# Altium PCB SAMV71_Xplained_Ultra.PcbDoc (part 5 of 7)
Units mm, origin at the board's own origin, x right, y up, seen from the top; angles counter-clockwise.
Board outline 90 x 135 mm, 8 copper layers (Top Layer LF-Signals, Ground Plane 1 (GND), Power Plane (VCC), Ground Plane 2 (GND), Signal Layer 1, Signal Layer 2, Ground Plane 3 (GND), Bottom Layer LF-Signals), stack 1.588 mm thick; 391 components, 330 nets, 1782 pads, 966 vias.
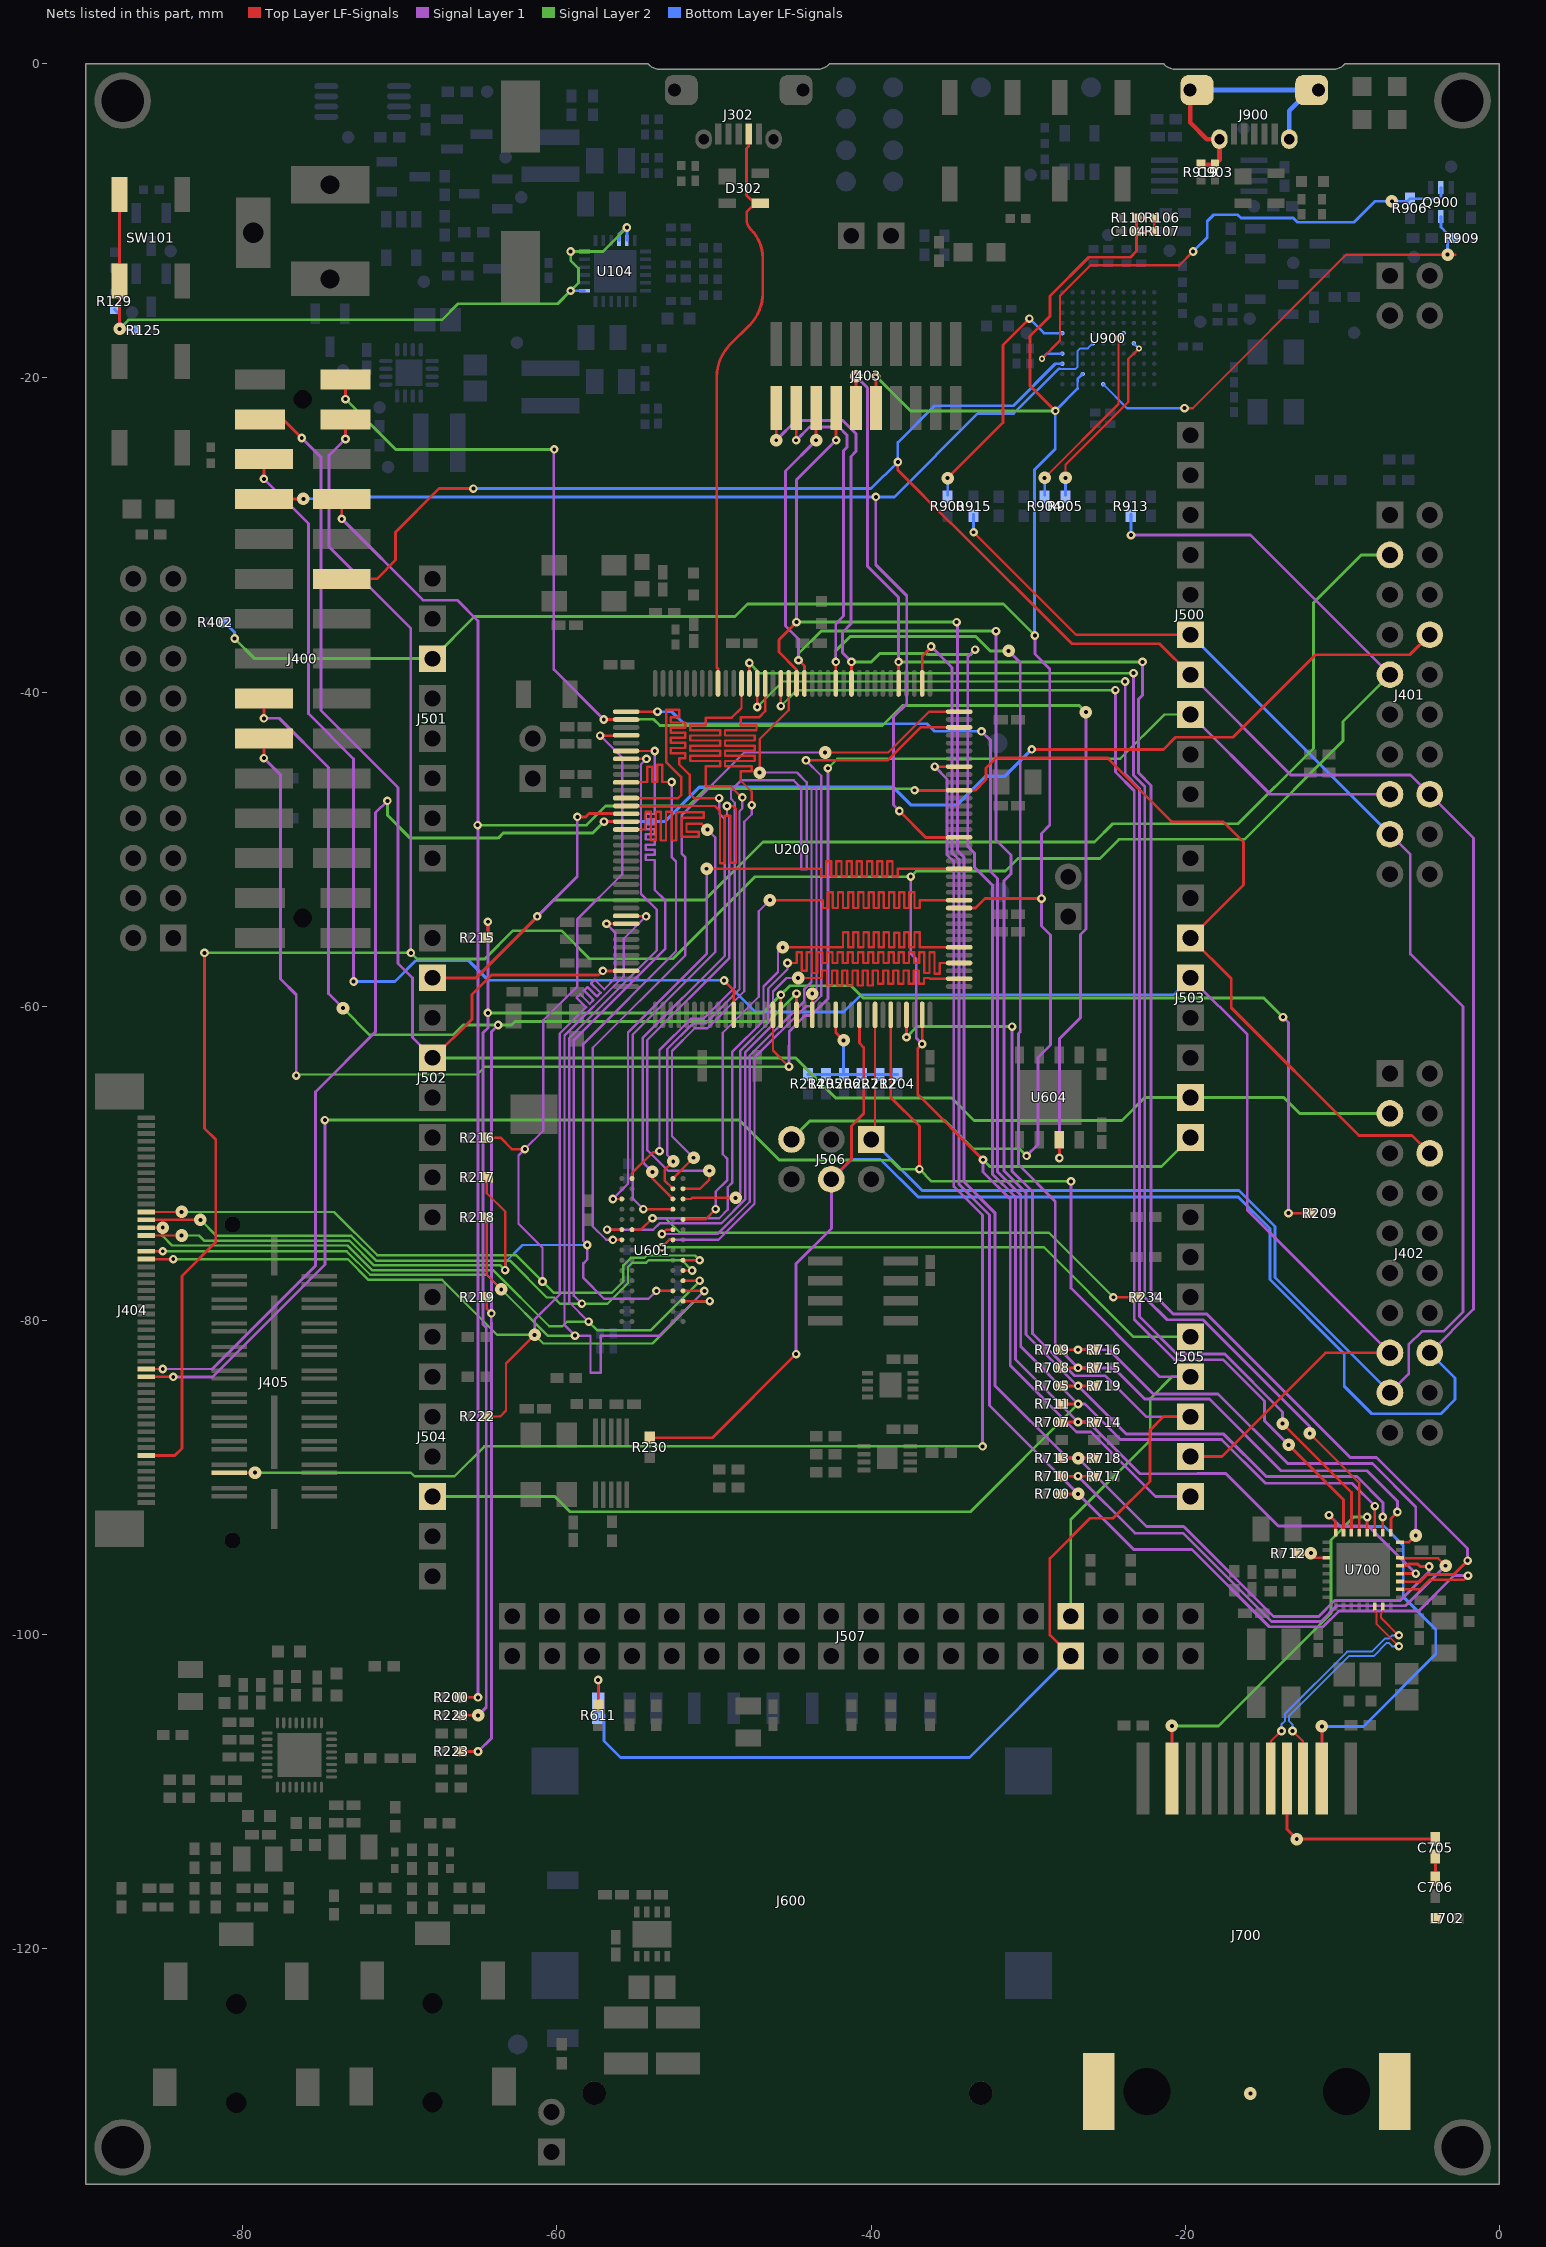
[diagram p11: the nets of this part, all layers, seen from the top]

## Via types
v1: diameter 0.55, hole 0.25, Top Layer LF-Signals to Bottom Layer LF-Signals, 547 vias
v2: diameter 0.55, hole 0.25, Top Layer LF-Signals to Bottom Layer LF-Signals, tented both sides, 190 vias
v3: diameter 0.55/0.55/0.55/0.8 (per signal layer), hole 0.25, Top Layer LF-Signals to Bottom Layer LF-Signals, tented top, 172 vias
v4: diameter 0.55, hole 0.25, Top Layer LF-Signals to Bottom Layer LF-Signals, tented top, 21 vias
v5: diameter 0.4, hole 0.2, Top Layer LF-Signals to Bottom Layer LF-Signals, tented both sides, 16 vias
v6: diameter 0.7, hole 0.35, Top Layer LF-Signals to Bottom Layer LF-Signals, 9 vias
v7: diameter 0.4, hole 0.2, Top Layer LF-Signals to Bottom Layer LF-Signals, tented top, 5 vias
v8: diameter 0.66, hole 0.33, Top Layer LF-Signals to Bottom Layer LF-Signals, tented top, 4 vias
v9: diameter 0.4, hole 0.2, Top Layer LF-Signals to Bottom Layer LF-Signals, 2 vias

## Nets (pads, with @x,y where several pads share a name; then routed paths per layer and width w, separated by ;. In a path a pad name is that pad's centre, name@x,y a point inside that pad or via, vN(x,y) a via of type N, cw(c..) or ccw(c..) an arc to the next point about the centre after c; other vN are vias at no path point) (continued)
PC23: U200.127 U601.R6 | length 53.9
  Top Layer LF-Signals w0.15: U601.R6@-55.222,-70.975 -55.222,-70.629 -53.887,-69.294 -53.541,-69.294 v1(-53.475,-69.228) ; v3(-47.1,-45.125) -47.1,-43 -45.25,-41.15 U200.127@-45.25,-39.45
  Signal Layer 1 w0.15: v1(-53.475,-69.228) -53.472,-69.225 -53.472,-62.798 -51.474,-60.8 -50.675,-60.8 -48.677,-58.802 -48.677,-47.045 -48.925,-46.798 -48.925,-46.275 -48.275,-45.625 -44.925,-45.625 -44.45,-46.1 -44.45,-51.3 -44.1,-51.3 -44.1,-45.75 -44.725,-45.125 v3(-47.1,-45.125)
PC24: U200.130 U601.R2 | length 53.6
  Top Layer LF-Signals w0.15: U601.R2@-52.622,-70.975 v3@-51.3,-69.653 ; v1(-47.6,-47.2) -47.6,-46.35 -48.3,-45.65 -48.3,-45.038 -47.592,-45.038 -47.592,-44.713 -49.3,-44.713 -49.3,-44.388 -47.4,-44.388 -47.4,-44.063 -49.3,-44.063 -49.3,-43.738 -47.4,-43.738 -47.4,-43.413 -49.3,-43.413 -49.3,-43.088 -47.4,-43.088 -47.4,-42.763 -49.3,-42.763 -49.3,-42.437 -47.3,-42.437 -47.3,-42.112 -48.3,-42.112 -48.3,-41.612 -47.137,-41.612 -46.75,-41.225 U200.130@-46.75,-39.45
  Signal Layer 1 w0.15: v3(-51.3,-69.65) -52.675,-68.275 -52.675,-62.85 -51.225,-61.4 -50.426,-61.4 -48.077,-59.051 -48.077,-48.254 -47.6,-47.776 v1(-47.6,-47.2)
PC25: U200.133 U601.P2 | length 54.4
  Top Layer LF-Signals w0.15: U601.P2@-52.622,-71.625 -53.15,-71.097 -53.15,-70.425 v3(-52.6,-69.875) ; U200.133@-48.25,-39.45 -48.25,-41.007 -48.868,-41.625 -50.525,-41.625 -50.525,-42.112 -51.525,-42.112 -51.525,-42.437 -49.6,-42.437 -49.6,-42.763 -51.525,-42.763 -51.525,-43.088 -49.6,-43.088 -49.6,-43.413 -51.525,-43.413 -51.525,-43.738 -49.6,-43.738 -49.6,-44.063 -51.525,-44.063 -51.525,-44.388 -49.6,-44.388 -49.6,-44.713 -50.525,-44.713 -50.525,-46 -48.95,-46 -48.248,-46.702 v1(-48.202,-46.702)
  Signal Layer 1 w0.15: v3(-52.6,-69.875) -52.6,-69.85 -52.975,-69.475 -52.975,-62.726 -51.349,-61.1 -50.551,-61.1 -48.377,-58.927 -48.377,-47.588 -48.202,-47.413 v1(-48.202,-46.702)
PC26: U200.13 U601.P1 | length 51.7
  Top Layer LF-Signals w0.15: U200.13@-55.6,-47.25 -50.8,-47.25 -50.798,-47.252 -49.945,-47.252 -49.652,-47.545 -49.652,-47.548 -49.625,-47.575 -49.625,-50.9 -49.325,-50.9 -49.325,-47.875 -48.975,-47.875 -48.975,-50.875 -48.6,-50.875 -48.6,-47.45 -48.8,-47.25 -49.177,-47.25 -49.18,-47.25 v1(-49.177,-47.252) ; U601.P1@-51.972,-71.625 -50.897,-71.625 -50.3,-71.028 v3(-50.3,-70.475)
  Signal Layer 1 w0.15: v3(-50.3,-70.475) -52.935,-70.475 -54.25,-69.16 -54.25,-62.15 -49.025,-56.925 -49.025,-47.975 -49.177,-47.823 v1(-49.177,-47.252)
PC27: U200.12 U601.N2 | length 53.9
  Top Layer LF-Signals w0.15: U200.12@-55.6,-46.75 -55.6,-46.752 -52.277,-46.752 -52.1,-46.575 -52.1,-45.4 -53.05,-44.45 -53.05,-41.125 -52.225,-41.125 -52.225,-41.612 -52.75,-41.612 -52.75,-41.938 -51.825,-41.938 -51.825,-42.263 -52.75,-42.263 -52.75,-42.588 -51.825,-42.588 -51.825,-42.913 -52.75,-42.913 -52.75,-43.238 -51.825,-43.238 -51.825,-43.563 -52.75,-43.563 -52.75,-43.888 -51.825,-43.888 -51.825,-44.213 -52.225,-44.213 -52.225,-44.6 -51.55,-45.275 -51.55,-46.475 -51.273,-46.752 -49.677,-46.752 v1(-49.675,-46.75) ; v3(-53.925,-70.55) -53.925,-70.972 U601.N2@-52.622,-72.275
  Signal Layer 1 w0.15: v3(-53.925,-70.55) -54.55,-69.925 -54.55,-62.024 -49.325,-56.799 -49.325,-48.099 -49.652,-47.772 -49.652,-47.545 -49.677,-47.52 -49.677,-46.752 v1(-49.675,-46.75)
PC28: U200.76 U601.N1 | length 54.6
  Top Layer LF-Signals w0.15: U601.N1@-51.972,-72.275 -51.471,-72.275 -51.4,-72.204 v3(-48.627,-72.204) ; v1(-45.325,-57.25) -44.738,-57.25 -44.738,-56.569 -44.413,-56.569 -44.413,-57.745 -44.088,-57.745 -44.088,-56.569 -43.763,-56.569 -43.763,-57.884 -43.438,-57.884 -43.438,-56.569 -43.113,-56.569 -43.113,-57.25 -42.788,-57.25 -42.788,-56.569 -42.463,-56.569 -42.463,-57.25 -42.138,-57.25 -42.138,-56.569 -41.813,-56.569 -41.813,-57.25 -41.488,-57.25 -41.488,-56.569 -41.163,-56.569 -41.163,-57.25 -40.838,-57.25 -40.838,-56.569 -40.513,-56.569 -40.513,-57.25 -40.188,-57.25 -40.188,-56.569 -39.863,-56.569 -39.863,-57.25 -39.538,-57.25 -39.538,-56.569 -39.213,-56.569 -39.213,-57.25 -38.888,-57.25 -38.888,-56.569 -38.563,-56.569 -38.563,-57.25 -38.238,-57.25 -38.238,-56.569 -37.913,-56.569 -37.913,-57.25 -37.588,-57.25 -37.588,-56.569 -37.263,-56.569 -37.263,-57.25 -36.938,-57.25 -36.938,-56.569 -36.612,-56.569 -36.612,-57.884 -36.287,-57.884 -36.287,-56.569 -35.962,-56.569 -35.962,-57.931 -35.637,-57.931 -35.637,-57.25 U200.76@-34.4,-57.25
  Signal Layer 1 w0.15: v3(-48.627,-72.204) -48.325,-71.901 -48.325,-62.824 -46.55,-61.049 -46.55,-58.874 -45.325,-57.649 v1(-45.325,-57.25)
PC29: U200.16 U601.M2 | length 52.9
  Top Layer LF-Signals w0.15: U200.16@-55.6,-48.75 -54.362,-48.75 -54.362,-47.611 -54.037,-47.611 -54.037,-49.45 -53.712,-49.45 -53.712,-47.611 -53.387,-47.611 -53.387,-49.45 -53.062,-49.45 -53.062,-47.611 -52.703,-47.611 -52.703,-49.45 -52.4,-49.45 -52.4,-47.645 -50.652,-47.645 -50.652,-48.007 -52.053,-48.007 -52.053,-49.22 -50.978,-49.22 -50.978,-48.888 -51.758,-48.888 -51.758,-48.391 -50.789,-48.391 v3(-50.427,-48.752) ; v1(-54.5,-72.925) U601.M2@-52.622,-72.925
  Signal Layer 1 w0.15: v1(-54.5,-72.925) -55.175,-72.25 -55.175,-61.801 -49.925,-56.551 -49.925,-49.255 v3(-50.427,-48.752)
PC30: J401.8@-4.43,-36.35 J404.33 U200.15 | length 120.6
  Top Layer LF-Signals w0.15: J404.33@-86.15,-83.1 v1(-85.1,-83.1)
  Top Layer LF-Signals w0.18: v1(-29.775,-43.65) -21.389,-43.65 -20.619,-42.88 -16.955,-42.88 -11.7,-37.625 -5.705,-37.625 J401.8@-4.43,-36.35
  Top Layer LF-Signals w0.2: v1(-57.005,-48.25) U200.15@-55.6,-48.25
  Signal Layer 1 w0.15: v1(-85.1,-83.1) -81.95,-83.1
  Signal Layer 1 w0.175: -81.95,-83.1 -75.375,-76.525 -75.375,-65.45 -71.55,-61.625 -71.55,-47.675 v1(-70.8,-46.925)
  Signal Layer 2 w0.2: v1(-70.8,-46.925) -70.8,-47.831 -69.335,-49.296 -63.75,-49.296 -63.437,-48.983 -57.738,-48.983 v1(-57.005,-48.25)
  Bottom Layer LF-Signals w0.2: v1(-57.005,-48.25) -53.146,-48.25 -50.955,-46.058 -38.585,-46.058 -37.443,-47.2 -34.554,-47.2 -32.711,-45.357 -31.482,-45.357 v1(-29.775,-43.65)
PC31: J401.3@-6.97,-31.27 J502.2@-67.93,-58.194 U200.14 | length 88.1
  Top Layer LF-Signals w0.18: v1(-58.7,-47.95) -58.17,-47.95 -57.955,-47.735 -55.6,-47.735 U200.14@-55.6,-47.75
  Top Layer LF-Signals w0.2: J502.2@-67.93,-58.194 -65.147,-58.194 v1@-61.256,-54.303
  Signal Layer 1 w0.18: v1(-61.256,-54.278) -58.705,-51.728 v1@-58.705,-47.95
  Signal Layer 2 w0.18: v1(-61.256,-54.278) -60.212,-53.235 -50.589,-53.235 -46.894,-49.54 -25.773,-49.54 -24.621,-48.388 -16.634,-48.388 -11.836,-43.59 -11.836,-34.311 -8.795,-31.27 J401.3@-6.97,-31.27
PD00: J504.6@-67.93,-91.214 R711.1 U200.1 U700.19 | length 137.2
  Top Layer LF-Signals w0.15: U700.19@-7.925,-93.525 v1(-7.925,-91.825)
  Top Layer LF-Signals w0.18: U200.1@-55.6,-41.25 v1(-53.6,-41.25) ; R711.1@-27.863,-85.323 v1(-26.819,-85.323)
  Signal Layer 1 w0.18: v1(-32.975,-42.5) -32.41,-43.065 -32.41,-51.414 -31.95,-51.874 -31.95,-70.537 -30.478,-72.009 -30.478,-81.664 v1(-26.819,-85.323) -26.377,-85.323 -24.116,-87.584 -17.683,-87.584 -14.892,-90.375 -9.375,-90.375 v1(-7.925,-91.825)
  Signal Layer 2 w0.18: J504.6@-67.93,-91.214 -60.139,-91.214 -59.168,-92.185 -33.681,-92.185 v1(-26.819,-85.323)
  Bottom Layer LF-Signals w0.18: v1(-53.6,-41.25) -52.69,-41.25 -51.925,-42.015 -36.432,-42.015 -35.947,-42.5 v1(-32.975,-42.5)
PD01: U200.132 U700.21 | length 88
  Top Layer LF-Signals w0.15: U200.132@-47.75,-39.45 v1(-47.75,-38.15) ; v3(-12.075,-87.2) -8.925,-90.35 U700.21@-8.925,-93.525
  Signal Layer 1 w0.18: v1(-23.3,-38.8) -23.3,-45.295 -22.575,-46.02 -22.575,-78.539 -21.15,-79.964 -18.861,-79.964 -12.075,-86.75 v3(-12.075,-87.2)
  Signal Layer 2 w0.18: v1(-47.75,-38.15) -47.1,-38.8 v1(-23.3,-38.8)
PD02: U200.131 U700.22 | length 87.6
  Top Layer LF-Signals w0.15: v1(-47.25,-40.95) U200.131@-47.25,-39.45
  Top Layer LF-Signals w0.18: v3(-13.8,-86.575) -9.425,-90.95 -9.425,-92.525 U700.22@-9.425,-93.525
  Signal Layer 1 w0.18: v1(-23.825,-39.325) -23.825,-45.237 -22.92,-46.142 -22.92,-79.764 -20.54,-82.144 -17.485,-82.144 -13.8,-85.829 v3(-13.8,-86.575)
  Signal Layer 2 w0.15: v1(-47.25,-40.95) -45.625,-39.325 v1(-23.825,-39.325)
PD03: U200.128 U700.23 | length 84.7
  Top Layer LF-Signals w0.15: v1(-45.75,-40.9) U200.128@-45.75,-39.45
  Top Layer LF-Signals w0.18: v3(-13.425,-87.925) -9.925,-91.425 U700.23@-9.925,-93.525
  Signal Layer 1 w0.18: v1(-24.45,-39.875) -24.45,-45.079 -23.25,-46.279 -23.25,-79.936 -20.682,-82.504 -17.592,-82.504 -14.96,-85.136 -14.96,-86.39 v3(-13.425,-87.925)
  Signal Layer 2 w0.15: v1(-45.75,-40.9) -44.725,-39.875 v1(-24.45,-39.875)
PD04: J403.14 R713.1 R718.2 U200.126 U700.13 | length 118.6
  Top Layer LF-Signals w0.185: U200.126@-44.75,-39.45 -44.75,-38.582 -45.875,-37.457 -45.875,-36.675 v1(-44.75,-35.55) ; v1(-42.23,-23.969) J403.14@-42.23,-21.91 ; R713.1@-27.869,-88.773 v3(-26.825,-88.773) R718.2@-25.794,-88.773 ; U700.13@-6.325,-95.625 -5.9,-95.625 -5.8,-95.525 -5.193,-95.525 -5.043,-95.675 v1(-4.475,-95.675)
  Signal Layer 1 w0.185: v1(-44.75,-35.55) -44.75,-26.489 v1(-42.23,-23.969) ; v1(-34.552,-35.552) -34.51,-35.593 -34.51,-50.09 -34.075,-50.525 -34.075,-71.2 -32.125,-73.15 -32.125,-84.146 -27.498,-88.773 v3(-26.825,-88.773) -22.473,-93.125 -20.1,-93.125 -14.377,-98.847 -11.501,-98.847 -10.491,-97.838 -6.309,-97.838 -5.114,-96.642 -5.111,-96.642 -4.475,-96.007 v1(-4.475,-95.675)
  Signal Layer 2 w0.185: v1(-44.75,-35.55) v1(-34.552,-35.552) v1(-34.552,-35.552)
PD05: J403.16 R705.1 R719.1 U200.125 U700.18 | length 109.5
  Top Layer LF-Signals w0.185: v1(-44.625,-37.975) -44.25,-38.35 U200.125@-44.25,-39.45 ; v3(-43.5,-23.969) J403.16@-43.5,-21.91 ; R705.1@-27.863,-84.173 v1(-26.819,-84.173) R719.1@-25.788,-84.173 ; U700.18@-7.425,-93.525 v1(-7.425,-92.525)
  Signal Layer 1 w0.185: v1(-44.625,-37.975) -44.625,-36.624 -45.461,-35.788 -45.461,-25.93 v3(-43.5,-23.969) ; v1(-32.05,-36.125) -32.05,-49.425 -31.1,-50.375 -31.1,-51.573 -31.542,-52.016 -31.542,-70.474 -30.145,-71.872 -30.145,-80.894 -26.866,-84.173 v1(-26.819,-84.173) -23.765,-87.226 -19.217,-87.226 ; -19.217,-87.226 -17.574,-87.226 -17.549,-87.251 -17.545,-87.251 -14.846,-89.95 -9.068,-89.95 -7.408,-91.611 -7.408,-92.508 v1(-7.425,-92.525)
  Signal Layer 2 w0.185: v1(-44.625,-37.975) -44.625,-37.55 -43.2,-36.125 v1(-32.05,-36.125)
PD06: J403.18 R708.1 R715.1 U200.121 U700.17 | length 110.1
  Top Layer LF-Signals w0.185: v1(-44.77,-23.969) J403.18@-44.77,-21.91 ; U200.121@-42.25,-39.45 v1(-42.25,-38.075) ; R708.1@-27.869,-83.023 v1(-26.825,-83.023) R715.1@-25.794,-83.023 ; U700.17@-6.925,-93.525 -6.907,-93.507 -6.907,-92.607 v1(-6.5,-92.2)
  Signal Layer 1 w0.185: v1(-44.77,-23.969) -43.925,-23.123 -42.054,-23.123 -41.527,-23.65 -41.527,-24.417 -41.75,-24.639 -41.75,-35.159 -42.25,-35.659 v1(-42.25,-38.075) ; v3(-31.25,-37.375) -30.508,-38.118 -30.508,-61.622 -30.618,-61.732 -30.618,-70.082 -28.275,-72.425 -28.275,-81.573 v1(-26.825,-83.023) -24.577,-83.023 -22.584,-85.016 -18.458,-85.016 -13.9,-89.575 -8.428,-89.575 -6.5,-91.503 v1(-6.5,-92.2)
  Signal Layer 2 w0.185: v1(-42.25,-38.075) -42.25,-37.375 -41.35,-36.475 -33.325,-36.475 -32.425,-37.375 v3(-31.25,-37.375)
PD07: J403.20 R707.1 R714.1 U200.119 U700.12 | length 113.6
  Top Layer LF-Signals w0.185: v3(-46.04,-23.969) J403.20@-46.04,-21.91 ; U200.119@-41.25,-39.45 v1(-41.25,-38.075) ; R707.1@-27.869,-86.473 v1(-26.825,-86.473) R714.1@-25.794,-86.473 ; U700.12@-6.325,-96.125 v1(-5.325,-96.125)
  Signal Layer 1 w0.185: v3(-46.04,-23.969) -44.781,-22.71 -41.802,-22.71 -40.976,-23.536 -40.976,-24.692 -41.281,-24.997 -41.281,-35.657 -41.827,-36.203 -41.827,-37.498 v1(-41.25,-38.075) ; v1(-33.375,-37.3) -33.85,-37.775 -33.85,-49.817 -33.415,-50.252 -33.415,-51.16 -32.282,-52.293 -32.282,-70.675 -30.81,-72.147 -30.81,-82.488 v1(-26.825,-86.473) -26.822,-86.476 -26.174,-86.476 -22.884,-89.766 -19.217,-89.766 -19.215,-89.764 -17.411,-89.764 -14.075,-93.1 -8.35,-93.1 v1(-5.325,-96.125)
  Signal Layer 2 w0.185: v1(-41.25,-38.075) -39.978,-38.075 -39.978,-38.071 -39.464,-37.557 -36.453,-37.557 -36.391,-37.619 -33.694,-37.619 v1(-33.375,-37.3)
  Bottom Layer LF-Signals w0.185: v1@-41.268,-38.057 v1(-41.25,-38.075)
PD08: J403.12 U200.113 U700.11 | length 111.3
  Top Layer LF-Signals w0.185: J403.12@-40.96,-21.91 v3(-40.96,-19.893) ; U200.113@-38.25,-39.45 v1(-38.25,-38.075) ; U700.11@-6.325,-96.625 -6.325,-96.642 -5.067,-96.642 -5.065,-96.64 -5.062,-96.64 -4.615,-96.193 -2.917,-96.193 v1(-2.025,-95.3)
  Signal Layer 1 w0.185: v3(-40.96,-19.893) -40.224,-20.63 -40.224,-31.994 -38.25,-33.968 v1(-38.25,-38.075) ; v1(-22.725,-38.075) -22.725,-40.208 -22.967,-40.45 -22.967,-45.158 -22.175,-45.95 -22.175,-78.175 -20.744,-79.606 -18.619,-79.606 -9.494,-88.731 -7.819,-88.731 -2.025,-94.525 v1(-2.025,-95.3)
  Signal Layer 2 w0.185: v1(-38.25,-38.075) v1(-22.725,-38.075)
PD09: R700.1 U200.110 U700.10 | length 95.8
  Top Layer LF-Signals w0.15: U700.10@-6.325,-97.125 -5.05,-97.125 -4.45,-96.525 -2.275,-96.525 v1(-2,-96.25)
  Top Layer LF-Signals w0.18: U200.110@-36.75,-39.45 -36.75,-37.725 -36.175,-37.15 -36.175,-37.104 v1(-36.177,-37.102) ; R700.1@-27.869,-91.048 v3(-26.825,-91.048)
  Signal Layer 1 w0.18: v1(-36.177,-37.102) -34.843,-38.436 -34.843,-50.228 -34.407,-50.663 -34.407,-71.338 -32.457,-73.288 -32.457,-85.415 -23.283,-94.59 -19.572,-94.59 -14.652,-99.51 -11.227,-99.51 -10.217,-98.5 -5.133,-98.5 -2.883,-96.25 v1(-2,-96.25)
PD10: J405.6 U200.101 | length 94.9
  Top Layer LF-Signals w0.15: v1(-35.95,-44.75) U200.101@-34.4,-44.75
  Top Layer LF-Signals w0.175: J405.6@-80.87,-89.7 v3(-79.225,-89.7)
  Signal Layer 1 w0.175: v1(-35.95,-44.75) -35.17,-45.53 -35.17,-50.363 -34.735,-50.798 -34.735,-71.473 -32.913,-73.296 -32.913,-88.012 v1(-32.9,-88.025)
  Signal Layer 2 w0.15: v3(-79.225,-89.7) -69.3,-89.7 -69.075,-89.925 -66.525,-89.925 -64.625,-88.025 v1(-32.9,-88.025)
PD11: J400.23 J402.6@-4.43,-69.37 J503.6@-19.67,-55.654 R200.1 U200.98 | length 165
  Top Layer LF-Signals w0.15: R200.1@-66.125,-104 v1(-65.025,-104)
  Top Layer LF-Signals w0.175: v1@-73.708,-28.967 J400.23@-73.708,-27.714 ; U200.98@-34.4,-46.25 -33.364,-46.25 -32.688,-45.573 -32.688,-44.838 -32.05,-44.2 -24.94,-44.2 -20.89,-48.25 -17.6,-48.25 -16.3,-49.55 -16.3,-52.284 J503.6@-19.67,-55.654 -17.075,-58.249 -17.075,-60.1 -8.95,-68.225 -5.575,-68.225 J402.6@-4.43,-69.37
  Top Layer LF-Signals w0.18: v1(-37.227,-46.252) -37.212,-46.267 -34.417,-46.267 U200.98@-34.4,-46.25
  Signal Layer 1 w0.18: v1(-73.705,-28.97) -68.525,-34.15 -66.35,-34.15 -65.035,-35.465 -65.035,-103.99 v1(-65.025,-104)
  Signal Layer 2 w0.18: v1(-65.05,-48.475) -58.12,-48.475 -56.907,-47.262 -51.612,-47.262 -50.51,-46.16 -37.319,-46.16 v1(-37.227,-46.252)
PD12: J400.24 U200.92 U900.G5 | length 83.3
  Top Layer LF-Signals w0.175: J400.24@-78.661,-27.714 -76.164,-27.714 v3(-76.15,-27.7)
  Top Layer LF-Signals w0.18: v1(-38.2,-47.575) -36.525,-49.25 U200.92@-34.4,-49.25
  Signal Layer 1 w0.18: v1(-39.702,-27.576) -39.702,-31.898 -37.735,-33.865 -37.735,-40.757 -38.575,-41.597 -38.575,-47.2 v1(-38.2,-47.575)
  Bottom Layer LF-Signals w0.125: -27.972,-19.425 -26.975,-19.425 -26.85,-19.3 -26.85,-18.275 -26.7,-18.125 -26.2,-18.125 U900.G5@-25.875,-17.8
  Bottom Layer LF-Signals w0.15: -28.075,-19.425 -27.972,-19.425
  Bottom Layer LF-Signals w0.175: v3(-76.15,-27.7) -72.69,-27.7 -72.575,-27.585
  Bottom Layer LF-Signals w0.18: -72.575,-27.585 -39.725,-27.585 v1@-39.7,-27.61 ; v1(-39.702,-27.576) -38.519,-27.576 -33.218,-22.275 -30.925,-22.275 -28.075,-19.425
PD13: U200.88 U601.N7 | length 54.6
  Top Layer LF-Signals w0.15: v1(-56.447,-72.275) U601.N7@-55.872,-72.275 ; v3(-50.475,-51.25) -43.188,-51.25 -43.188,-51.731 -42.863,-51.731 -42.863,-50.769 -42.538,-50.769 -42.538,-51.731 -42.213,-51.731 -42.213,-50.769 -41.888,-50.769 -41.888,-51.731 -41.563,-51.731 -41.563,-50.769 -41.238,-50.769 -41.238,-51.731 -40.913,-51.731 -40.913,-50.769 -40.588,-50.769 -40.588,-51.731 -40.263,-51.731 -40.263,-50.769 -39.938,-50.769 -39.938,-51.731 -39.613,-51.731 -39.613,-50.769 -39.288,-50.769 -39.288,-51.731 -38.963,-51.731 -38.963,-50.769 -38.637,-50.769 -38.637,-51.731 -38.312,-51.731 -38.312,-51.25 U200.88@-34.4,-51.25
  Signal Layer 1 w0.15: v1(-56.447,-72.275) -55.475,-71.303 -55.475,-61.676 -50.475,-56.676 v3(-50.475,-51.25)
PD14: U200.84 U601.L1 | length 54.6
  Top Layer LF-Signals w0.15: U601.L1@-51.972,-73.575 -50.55,-73.575 v1(-49.9,-72.925) ; v3(-46.45,-53.25) -43.088,-53.25 -43.088,-53.746 -42.763,-53.746 -42.763,-52.754 -42.438,-52.754 -42.438,-53.746 -42.113,-53.746 -42.113,-52.754 -41.788,-52.754 -41.788,-53.746 -41.463,-53.746 -41.463,-52.754 -41.138,-52.754 -41.138,-53.746 -40.813,-53.746 -40.813,-52.754 -40.488,-52.754 -40.488,-53.746 -40.163,-53.746 -40.163,-52.754 -39.838,-52.754 -39.838,-53.746 -39.513,-53.746 -39.513,-52.754 -39.188,-52.754 -39.188,-53.746 -38.863,-53.746 -38.863,-52.754 -38.538,-52.754 -38.538,-53.746 -38.213,-53.746 -38.213,-52.754 -37.888,-52.754 -37.888,-53.746 -37.563,-53.746 -37.563,-52.754 -37.237,-52.754 -37.237,-53.746 -36.912,-53.746 -36.912,-53.25 U200.84@-34.4,-53.25
  Signal Layer 1 w0.15: v1(-49.9,-72.925) -49.9,-71.818 -49.15,-71.068 -49.15,-69.725 -49.45,-69.425 -49.45,-61.696 -47.15,-59.396 -47.15,-53.95 v3(-46.45,-53.25)
PD15: J505.5@-19.67,-81.054 U200.106 U601.J2 | length 85.2
  Top Layer LF-Signals w0.15: v1(-53.325,-75.35) -52.85,-74.875 U601.J2@-52.622,-74.875 ; v1(-44.15,-44.35) -38.95,-44.35 -36.85,-42.25 U200.106@-34.4,-42.25
  Signal Layer 1 w0.15: v1(-53.325,-75.35) -52.85,-74.875 -49.724,-74.875 -47.425,-72.576 -47.425,-63.269 -44.156,-60 -43.843,-60 -43.175,-59.332 -43.175,-45.325 v1(-44.15,-44.35)
  Signal Layer 2 w0.15: v1(-53.325,-75.35) -29,-75.35 -23.296,-81.054 J505.5@-19.67,-81.054
PD16: R234.1 U200.78 U601.K6 | length 84.2
  Top Layer LF-Signals w0.15: U601.K6@-55.222,-74.225 -54.647,-74.225 v1(-53.922,-73.5) ; v3(-45.625,-56.25) -43.275,-56.25 -41.788,-56.25 -41.788,-55.288 -41.463,-55.288 -41.463,-56.25 -41.138,-56.25 -41.138,-55.288 -40.813,-55.288 -40.813,-56.25 -40.488,-56.25 -40.488,-55.288 -40.163,-55.288 -40.163,-56.25 -39.838,-56.25 -39.838,-55.288 -39.513,-55.288 -39.513,-56.25 -39.188,-56.25 -39.188,-55.288 -38.863,-55.288 -38.863,-56.25 -38.538,-56.25 -38.538,-55.313 -38.213,-55.313 -38.213,-56.25 -37.888,-56.25 -37.888,-55.288 -37.563,-55.288 -37.563,-56.25 -37.238,-56.25 -37.238,-55.288 -36.913,-55.288 -36.913,-56.25 -36.588,-56.25 -36.263,-56.25 -35.937,-56.25 -35.775,-56.25 U200.78@-34.4,-56.25 ; v1@-24.569,-78.525 R234.1@-23.1,-78.525
  Signal Layer 1 w0.15: v1(-53.922,-73.5) -49.675,-73.5 -49.127,-72.952 -49.127,-71.527 -48.85,-71.25 -48.85,-62.925 -46.85,-60.925 -46.85,-58.75 -45.925,-57.825 -45.925,-56.55 v3(-45.625,-56.25)
  Signal Layer 2 w0.15: v1(-53.922,-73.5) -53.1,-73.5 -52.175,-74.425 -28.681,-74.425 v1(-24.575,-78.531)
PD17: U200.74 U601.K7 | length 54.6
  Top Layer LF-Signals w0.15: v1(-56.803,-74.229) -55.876,-74.229 U601.K7@-55.872,-74.225 ; v3(-44.652,-58.203) -43.138,-58.203 -43.138,-57.727 -42.813,-57.727 -42.813,-58.678 -42.488,-58.678 -42.488,-57.727 -42.163,-57.727 -42.163,-58.678 -41.838,-58.678 -41.838,-57.727 -41.513,-57.727 -41.513,-58.678 -41.188,-58.678 -41.188,-57.727 -40.863,-57.727 -40.863,-58.678 -40.538,-58.678 -40.538,-57.727 -40.213,-57.727 -40.213,-58.678 -39.888,-58.678 -39.888,-57.727 -39.563,-57.727 -39.563,-58.563 -39.238,-58.563 -39.238,-57.727 -38.913,-57.727 -38.913,-58.563 -38.588,-58.563 -38.588,-57.727 -38.263,-57.727 -38.263,-58.563 -37.938,-58.563 -37.938,-57.727 -37.613,-57.727 -37.613,-58.563 -37.287,-58.563 -37.287,-57.727 -36.962,-57.727 -36.962,-58.563 -36.637,-58.563 -36.637,-58.203 -36.3,-58.203 -36.253,-58.25 U200.74@-34.4,-58.25
  Signal Layer 1 w0.15: v1(-56.803,-74.229) -53.879,-74.229 -53.475,-73.825 -49.542,-73.825 -48.025,-72.308 -48.025,-62.949 -46.25,-61.174 -46.25,-59.068 -45.385,-58.203 v3(-44.652,-58.203)
PD18: J505.3@-19.67,-86.134 J507.8 J600.10 R611.1 U200.69 | length 100.1
  Top Layer LF-Signals w0.175: R611.1@-57.378,-104.52 v1(-57.378,-102.9) ; v1(-37.752,-61.978) v1(-37.752,-61.978) U200.69@-37.75,-60.55 ; J507.8@-27.29,-101.374 -28.625,-100.039 -28.625,-95.15 -26.075,-92.6 -24.6,-92.6 -22.25,-90.25 -22.25,-87 -21.384,-86.134 J505.3@-19.67,-86.134
  Signal Layer 1 w0.175: v1(-31.025,-61.3) -31.025,-70.508 -29.725,-71.808 -29.725,-80.848 -27.037,-83.535 -25.09,-83.535 -22.491,-86.134 J505.3@-19.67,-86.134
  Signal Layer 2 w0.175: v1(-37.752,-61.978) -37.074,-61.3 v1(-31.025,-61.3)
  Bottom Layer LF-Signals w0.175: J600.10@-57.378,-104.7 v1(-57.378,-102.9) ; J600.10@-57,-105.1 -57,-106.78 -55.955,-107.825 -33.741,-107.825 J507.8@-27.29,-101.374
PD19: J404.34 J505.4@-19.67,-83.594 J507.7 U200.67 | length 119.1
  Top Layer LF-Signals w0.15: J404.34@-86.15,-83.6 v1(-84.433,-83.6)
  Top Layer LF-Signals w0.175: U200.67@-38.75,-60.55 -38.75,-65.8 -36.925,-67.625 v1(-36.925,-70.375)
  Signal Layer 1 w0.175: v1(-84.433,-83.6) -81.925,-83.6 -74.775,-76.45 v1(-74.775,-67.25) ; v1(-27.276,-71.15) -27.275,-77.95 -21.631,-83.594 J505.4@-19.67,-83.594
  Signal Layer 2 w0.175: -41.309,-69.8 -38.75,-69.8 -38.175,-70.375 v1(-36.925,-70.375) -36.15,-71.15 v1(-27.276,-71.15) ; J507.7@-27.29,-98.834 -27.29,-92.69 -22.225,-87.625 -22.225,-84.975 -20.844,-83.594 J505.4@-19.67,-83.594
  Signal Layer 2 w0.18: v1(-74.775,-67.25) -48.4,-67.25 -45.85,-69.8 -41.309,-69.8
PD20: J401.17@-6.97,-49.05 J402.17@-6.97,-84.61 J500.5@-19.67,-36.35 J506.1@-39.99,-68.481 R915.2 U200.65 | length 125.5
  Top Layer LF-Signals w0.15: J506.1@-39.99,-68.481 -39.75,-68.241 U200.65@-39.75,-60.55 ; v1(-33.475,-29.825) -26.95,-36.35 J500.5@-19.67,-36.35
  Signal Layer 1 w0.175: J402.17@-6.97,-84.61 -5.775,-83.415 -5.775,-81.55 -4.925,-80.7 -3.555,-80.7 -2.325,-79.47 -2.325,-60.025 -5.67,-56.68 -5.67,-50.35 J401.17@-6.97,-49.05
  Bottom Layer LF-Signals w0.175: J506.1@-39.99,-68.481 -36.744,-71.727 -16.585,-71.727 -14.288,-74.024 -14.288,-77.274 -6.97,-84.592 J402.17@-6.97,-84.61 ; v1(-33.475,-29.825) R915.2@-33.475,-28.675 ; J500.5@-19.67,-36.35 J401.17@-6.97,-49.05
PD21: J400.19 J401.16@-4.43,-46.51 J402.16@-4.43,-82.07 J500.4@-19.67,-38.89 J506.4@-42.53,-71.021 R230.1 U200.63 U900.K3 | length 223.2
  Top Layer LF-Signals w0.175: J400.19@-73.708,-32.794 -71.469,-32.794 -70.275,-31.6 -70.275,-29.825 -67.5,-27.05
  Top Layer LF-Signals w0.18: -67.5,-27.05 v1(-65.325,-27.05) ; R230.1@-54.1,-87.475 -50.1,-87.475 v1(-44.775,-82.15) ; J506.4@-42.53,-71.021 -41.25,-69.741 -41.25,-67.625 -40.475,-66.85 -40.475,-62.625 -40.75,-62.35 U200.63@-40.75,-60.55 ; v1(-38.3,-25.35) -38.3,-25.882 -34.947,-29.235 -34.912,-29.235 -27.222,-36.925 -21.635,-36.925 J500.4@-19.67,-38.89
  Signal Layer 1 w0.175: J500.4@-19.67,-38.89 -13.285,-45.275 -5.665,-45.275 J401.16@-4.43,-46.51 -1.65,-49.29 -1.65,-79.29 J402.16@-4.43,-82.07
  Signal Layer 1 w0.18: v1(-44.775,-82.15) -44.775,-76.4 -42.53,-74.155 J506.4@-42.53,-71.021
  Bottom Layer LF-Signals w0.15: -28.275,-19.1 U900.K3@-27.825,-19.1
  Bottom Layer LF-Signals w0.18: v1(-65.325,-27.05) -40,-27.05 v1(-38.3,-25.35) -38.3,-24.107 -35.963,-21.77 -30.945,-21.77 -28.275,-19.1 ; J506.4@-42.53,-71.021 -41.259,-69.75 -39.4,-69.75 -37,-72.15 -16.625,-72.15 -14.615,-74.16 -14.615,-77.41 -9.875,-82.15 -9.875,-84.2 -8.125,-85.95 -3.725,-85.95 -2.825,-85.05 -2.825,-83.675 J402.16@-4.43,-82.07
PD22: R204.1 R205.1 R206.2 R212.1 R214.2 R227.1 U200.60 | length 9.7
  Top Layer LF-Signals w0.175: U200.60@-42.25,-60.55 -42.25,-61.68 v3(-41.752,-62.178)
  Bottom Layer LF-Signals w0.175: R214.2@-44.028,-64.349 R206.2@-41.728,-64.349 ; v3(-41.752,-62.178) -41.752,-64.326 R206.2@-41.728,-64.349 ; R204.1@-38.303,-64.349 R206.2@-41.728,-64.349
PD23: U200.57 U601.K2 | length 50.1
  Top Layer LF-Signals w0.15: v1(-53.328,-74.504) -53.049,-74.225 U601.K2@-52.622,-74.225 ; U200.57@-43.75,-60.55 v3(-43.75,-59.2)
  Signal Layer 1 w0.15: v1(-53.328,-74.504) -49.776,-74.504 -47.725,-72.452 -47.725,-63.144 -44.375,-59.794 -44.25,-59.669 -44.25,-58.9 -43.8,-58.45 -43.8,-46.1 -43.475,-46.1 -43.475,-58.925 v3(-43.75,-59.2)
PD24: J400.14 R219.1 R223.1 U200.55 | length 103.4
  Top Layer LF-Signals w0.175: v1@-78.661,-41.667 J400.14@-78.661,-40.414 ; R223.1@-66.125,-107.45 v1(-65.025,-107.45) ; R219.1@-64.475,-78.519 -64.475,-79.257 v1(-64.178,-79.554) ; v1(-44.752,-59.203) -44.75,-59.205 U200.55@-44.75,-60.55
  Signal Layer 1 w0.175: v1(-78.658,-41.67) -77.68,-41.67 -74.55,-44.8 -74.55,-59.2 v3(-73.625,-60.125) ; -64.178,-80.142 v1(-64.178,-79.554)
  Signal Layer 1 w0.18: v1(-65.025,-107.45) -64.178,-106.603 -64.178,-80.142 ; v1(-64.178,-79.554) -64.178,-61.628 v1(-63.75,-61.2)
  Signal Layer 2 w0.175: v3(-73.625,-60.125) -71.929,-61.821 -66.604,-61.821 -65.983,-61.2 v1(-63.75,-61.2) -62.888,-61.2 -62.661,-60.972 -46.522,-60.972 v1@-44.753,-59.203
PD25: J400.12 J401.15@-6.97,-46.51 J500.3@-19.67,-41.43 U200.52 | length 117.2
  Top Layer LF-Signals w0.15: U200.52@-46.25,-60.55 -46.25,-62.825 v1(-45.225,-63.85)
  Top Layer LF-Signals w0.18: v1@-78.661,-44.207 J400.12@-78.661,-42.954
  Signal Layer 1 w0.175: v1(-45.225,-63.85) -45.225,-62.501 -45.215,-62.49 -45.215,-61.615 -44.2,-60.6 -43.825,-60.6 -42.752,-59.527 v1(-42.752,-44.852)
  Signal Layer 1 w0.18: v1(-78.658,-44.21) -77.6,-45.268 -77.6,-58.275 -76.6,-59.275 v1(-76.6,-64.425) ; J500.3@-19.67,-41.43 -14.59,-46.51 J401.15@-6.97,-46.51
  Signal Layer 2 w0.15: v1(-76.6,-64.425) -76.524,-64.349 -65.099,-64.349 -64.6,-63.85 v1(-45.225,-63.85) ; v1(-42.752,-44.852) -42.15,-44.25 -24.15,-44.25 -21.33,-41.43 J500.3@-19.67,-41.43
PD26: R209.1 R215.1 R229.1 U200.53 | length 120.5
  Top Layer LF-Signals w0.15: R229.1@-66.125,-105.15 v3(-65.025,-105.15)
  Top Layer LF-Signals w0.175: v1(-13.425,-73.175) R209.1@-12.05,-73.175
  Top Layer LF-Signals w0.18: R215.1@-64.475,-55.644 -64.4,-55.569 v1(-64.4,-54.625) ; U200.53@-45.75,-60.55 v1(-45.75,-59.275)
  Signal Layer 1 w0.175: v1(-13.775,-60.7) -13.425,-61.05 v1(-13.425,-73.175)
  Signal Layer 1 w0.18: v3(-65.025,-105.15) -64.508,-104.633 -64.508,-80.467 -64.705,-80.27 -64.705,-61.688 -64.4,-61.383 v1(-64.4,-60.425) v1(-64.4,-54.625)
  Signal Layer 2 w0.15: -45.175,-58.7 -44.862,-58.7 -44.859,-58.703 -44.445,-58.703 -44.442,-58.7 -41.275,-58.7
  Signal Layer 2 w0.18: v1(-64.4,-60.425) -46.9,-60.425 v1(-45.75,-59.275) -45.175,-58.7 ; -41.275,-58.7 -40.5,-59.475 -15,-59.475 v1(-13.775,-60.7)
PD27: J400.26 J402.15@-6.97,-82.07 J503.5@-19.67,-58.194 J505.2@-19.67,-88.674 U200.47 | length 138.6
  Top Layer LF-Signals w0.175: v1@-78.661,-26.427 J400.26@-78.661,-25.174 ; v1(-49.36,-58.365) -48.75,-58.975 U200.47@-48.75,-60.55 ; J505.2@-19.67,-88.674 -17.674,-88.674 -11.07,-82.07 J402.15@-6.97,-82.07
  Signal Layer 1 w0.175: v1(-78.658,-26.43) -75.825,-29.264 -75.825,-41.375 -72.95,-44.25 v1(-72.95,-58.425) ; J503.5@-19.67,-58.194 -16.05,-61.814 -16.05,-72.99 J402.15@-6.97,-82.07
  Bottom Layer LF-Signals w0.175: v1(-72.95,-58.425) -70.325,-58.425 -69.006,-57.106 -65.619,-57.106 -64.375,-58.35 v1@-49.475,-58.35 ; v1(-49.36,-58.365) -47.35,-60.375 -41.75,-60.375 -40.65,-59.275 -20.751,-59.275 J503.5@-19.67,-58.194
PD28: J400.27 J401.9@-6.97,-38.89 J404.44 J503.1@-19.67,-68.354 J505.1@-19.67,-91.214 R913.1 U200.71 | length 243.7
  Top Layer LF-Signals w0.15: v1@-36.75,-62.475 U200.71@-36.75,-60.55
  Top Layer LF-Signals w0.175: J404.44@-86.15,-88.6 -86.137,-88.613 -84.338,-88.613 -83.875,-88.15 -83.875,-77.175 -81.725,-75.025 -81.725,-68.487 -82.437,-67.775 v1(-82.437,-56.6) ; v1(-73.467,-23.887) J400.27@-73.467,-22.634 ; v1@-36.75,-62.475 -36.75,-62.405 v1(-36.752,-62.403) -37.025,-62.676 -37.025,-65.625 v1(-32.875,-69.775)
  Signal Layer 1 w0.175: v1(-73.467,-23.887) -74.51,-24.93 -74.51,-30.75 -69.303,-35.957 v1(-69.303,-56.603) ; v1(-37.477,-51.753) -37.475,-51.751 -37.475,-56.65 -37.125,-57 -37.125,-62.03 v1(-36.752,-62.403) ; v1(-32.875,-69.775) -32.875,-70.549 -31.14,-72.284 -31.14,-82.883 -26.912,-87.11 -26.006,-87.11 -21.903,-91.214 J505.1@-19.67,-91.214
  Signal Layer 1 w0.18: v1@-23.503,-30.005 -15.855,-30.005 J401.9@-6.97,-38.89
  Signal Layer 2 w0.175: v1@-82.428,-56.603 v1(-69.303,-56.603) -68.906,-57 -64.6,-57 -62.792,-55.192 -59.707,-55.192 -57.918,-56.981 -52.606,-56.981 -47.378,-51.753 v1(-37.477,-51.753) -37.124,-51.4 -31.45,-51.4 -30.65,-50.6 -25.437,-50.6 -24.212,-49.375 -16.225,-49.375 -9.95,-43.1 -9.95,-41.87 J401.9@-6.97,-38.89 ; v1(-32.875,-69.775) -32.45,-70.2 -21.516,-70.2 J503.1@-19.67,-68.354
  Bottom Layer LF-Signals w0.18: v1(-23.459,-30.014) R913.1@-23.459,-28.668
PD29: U200.108 U601.J7 | length 51.3
  Top Layer LF-Signals w0.15: v1(-56.447,-74.875) U601.J7@-55.872,-74.875 ; v3(-42.925,-43.85) -38.916,-43.85 -36.316,-41.25 U200.108@-34.4,-41.25
  Signal Layer 1 w0.15: v1(-56.447,-74.875) -56.864,-74.875 -57.722,-74.017 -57.722,-62.648 -51.825,-56.751 -51.825,-56.254 -51.825,-50.529 -52.05,-50.304 -52.05,-47.824 -48.076,-43.85 v3(-42.925,-43.85)
PD30: J400.28 J402.3@-6.97,-66.83 J502.4@-67.93,-63.274 J503.2@-19.67,-65.814 U200.34 | length 125.3
  Top Layer LF-Signals w0.175: J400.28@-78.903,-22.634 -77.441,-22.634 v1(-76.25,-23.825)
  Top Layer LF-Signals w0.18: J502.4@-67.897,-63.307 -65.418,-60.828 -65.418,-59.263 -64.178,-58.023 -57.347,-58.023 v1(-57.078,-57.753) -57.075,-57.75 U200.34@-55.6,-57.75
  Signal Layer 1 w0.18: v1(-76.25,-23.825) -75.025,-25.05 -75.025,-41.175 -70.125,-46.075 -70.125,-57.275 -69.206,-58.194 -69.206,-61.998 J502.4@-67.93,-63.274
  Signal Layer 2 w0.18: J502.4@-67.905,-63.299 -44.796,-63.299 -42.25,-65.845 -34.868,-65.845 -33.444,-67.269 -24.037,-67.269 -22.582,-65.814 J503.2@-19.67,-65.814 -13.732,-65.814 -12.716,-66.83 J402.3@-6.97,-66.83 J402.3@-7.044,-66.904
PD31: J400.29 U200.2 U604.7 | length 97.7
  Top Layer LF-Signals w0.175: v1(-73.467,-21.347) J400.29@-73.467,-20.094 ; v1(-57.025,-41.75) U200.2@-55.6,-41.75
  Top Layer LF-Signals w0.18: v1(-28.015,-69.663) U604.7@-28.015,-68.5
  Signal Layer 1 w0.175: v1(-60.175,-24.55) -60.2,-24.525 -60.2,-38.575 v1(-57.025,-41.75)
  Signal Layer 1 w0.18: v1(-28.015,-69.663) -28.015,-62.072 -26.675,-60.732 -26.675,-55.435 -26.325,-55.085 v3(-26.325,-41.275)
  Signal Layer 2 w0.175: v1(-73.467,-21.347) -70.264,-24.55 v1(-60.175,-24.55) ; v1(-57.025,-41.75) -57.012,-41.737 -53.838,-41.737 -53.452,-42.123 -39.273,-42.123 -38.002,-40.852 -26.748,-40.852 v3(-26.325,-41.275)
PE00: J404.13 R216.1 U200.4 U601.G1 | length 83.2
  Top Layer LF-Signals w0.15: J404.13@-86.15,-73.1 v3(-83.9,-73.1) ; R216.1@-64.475,-68.369 -63.606,-68.369 -62.875,-69.1 v1(-62.05,-69.1) ; v1(-57.25,-42.775) -55.625,-42.775 U200.4@-55.6,-42.75 ; U601.G1@-51.972,-76.175 v1(-50.922,-76.175)
  Signal Layer 1 w0.15: v1(-60.925,-77.525) -60.925,-75.375 -62.45,-73.85 -62.45,-69.5 v1(-62.05,-69.1) -60.875,-67.925 -60.875,-60.9 -58.7,-58.725 -58.7,-54.453 -55.85,-51.603 -55.85,-44.175 v1(-57.25,-42.775)
  Signal Layer 2 w0.15: v3(-83.9,-73.1) -74.197,-73.1 -71.447,-75.85 -62.6,-75.85 v1(-60.925,-77.525) -60.2,-78.25 -56.515,-78.25 -55.775,-77.51 -55.775,-76.501 -55.299,-76.025 -54.44,-76.025 -54.29,-75.875 -51.222,-75.875 v1(-50.922,-76.175)
PE01: J404.14 U200.6 U601.F1 | length 85.2
  Top Layer LF-Signals w0.15: J404.14@-86.15,-73.6 v3(-82.7,-73.6) ; U200.6@-55.6,-43.75 v1(-53.775,-43.75) ; U601.F1@-51.972,-76.825 v1(-51.397,-76.825)
  Signal Layer 1 w0.15: v1(-58.416,-78.941) -58.922,-78.435 -58.922,-62.146 -53.1,-56.324 -53.1,-53.275 -53.775,-52.6 -53.775,-50.688 -54.35,-50.688 -54.35,-50.363 -53.775,-50.363 -53.775,-50.038 -54.35,-50.038 -54.35,-49.713 -53.775,-49.713 -53.775,-49.388 -54.35,-49.388 -54.35,-49.063 -53.775,-49.063 -53.775,-48.738 -54.35,-48.738 -54.35,-48.413 -53.775,-48.413 -53.775,-48.088 -54.35,-48.088 -54.35,-47.763 -53.775,-47.763 v1(-53.775,-43.75)
  Signal Layer 2 w0.15: v3(-82.7,-73.6) -81.675,-74.625 -73.096,-74.625 -71.521,-76.2 -63,-76.2 -60.65,-78.55 -60.2,-78.55 -59.809,-78.941 v1(-58.416,-78.941) -56.782,-78.941 -56.391,-78.55 -55.475,-77.634 -55.475,-76.625 -55.175,-76.325 -54.316,-76.325 -54.166,-76.175 -52.047,-76.175 v1(-51.397,-76.825)
PE02: J404.15 U200.7 U601.E1 | length 81.4
  Top Layer LF-Signals w0.15: J404.15@-86.15,-74.1 v3(-85.1,-74.1) ; U200.7@-55.6,-44.25 v1(-54.3,-44.25) ; U601.E1@-51.972,-77.475 v1(-50.922,-77.475)
  Signal Layer 1 w0.15: v1(-57.988,-80.087) -59.222,-78.853 -59.222,-62.022 -53.65,-56.45 -53.65,-53.85 -54.65,-52.85 -54.65,-44.6 v1(-54.3,-44.25)
  Signal Layer 2 w0.15: v3(-85.1,-74.1) -85.1,-74.64 -84.506,-75.234 -73.336,-75.234 -71.77,-76.8 -64.068,-76.8 -60.493,-80.375 -59.65,-80.375 -59.362,-80.087 v1(-57.988,-80.087) -57.45,-80.625 -54.015,-80.625 -50.922,-77.532 v1(-50.922,-77.475)
PE03: J404.16 R217.1 U200.10 U601.D2 | length 84.2
  Top Layer LF-Signals w0.15: J404.16@-86.15,-74.6 v3(-83.9,-74.6) ; R217.1@-64.475,-70.894 -64.475,-71.903 -63.3,-73.078 v1(-63.3,-76.8) ; U200.10@-55.6,-45.75 -55.577,-45.727 -54.263,-45.727 -54.263,-44.749 -53.937,-44.749 -53.937,-45.727 -53.612,-45.727 -53.612,-44.633 -53.287,-44.633 -53.287,-45.727 v1(-52.703,-45.727) ; v1(-53.672,-78.125) U601.D2@-52.622,-78.125
  Signal Layer 1 w0.15: v1(-53.672,-78.125) -54.172,-78.625 -57.001,-78.625 -58.322,-77.304 -58.322,-76.375 -58.075,-76.128 v1(-58.075,-75.2) -58.322,-74.953 -58.322,-62.4 -52.425,-56.503 -52.425,-56.254 -52.425,-50.778 -52.703,-50.5 v1(-52.703,-45.727)
  Signal Layer 2 w0.15: v3(-83.9,-74.6) -82.8,-74.6 -82.475,-74.925 -73.221,-74.925 -71.646,-76.5 -63.6,-76.5 v1(-63.3,-76.8)
  Bottom Layer LF-Signals w0.15: v1(-63.3,-76.8) -63.3,-76.3 -62.2,-75.2 v1(-58.075,-75.2)
PE04: J404.18 R218.1 U200.27 U601.D1 | length 80.4
  Top Layer LF-Signals w0.15: J404.18@-86.15,-75.6 v1(-85.1,-75.6) ; R218.1@-64.475,-73.444 -64.475,-77.1 v3(-63.55,-78.025) ; U200.27@-55.6,-54.25 -55.572,-54.278 v1(-54.328,-54.278) ; U601.D1@-51.972,-78.125 -50.625,-78.125 v1(-50.621,-78.129)
  Signal Layer 1 w0.15: v1(-54.328,-54.278) -55.75,-55.7 -55.75,-58.099 -59.522,-61.871 -59.522,-80.303 v1(-58.85,-80.975) -58.521,-80.975 -57.863,-80.975 -57.863,-83.348 -57.205,-83.348 -57.205,-80.975 -53.897,-80.975 -53.467,-80.975 v1(-50.621,-78.129)
  Signal Layer 2 w0.15: v1(-85.1,-75.6) -73.394,-75.6 -71.894,-77.1 -64.475,-77.1 v3(-63.55,-78.025) -60.6,-80.975 v1(-58.85,-80.975)
PE05: J404.19 R222.1 U200.28 U601.C1 | length 82.8
  Top Layer LF-Signals w0.15: J404.19@-86.15,-76.1 v1(-84.433,-76.1) ; R222.1@-64.475,-86.119 -63.606,-86.119 -63.606,-86.106 -63.25,-85.75 -63.25,-82.75 v3(-61.425,-80.925) ; v1(-56.85,-54.75) U200.28@-55.6,-54.75 ; U601.C1@-51.972,-78.775 v1(-50.275,-78.775)
  Signal Layer 1 w0.15: v3(-61.425,-80.925) -61.425,-79.95 -59.822,-78.347 -59.822,-61.747 -58.144,-60.069 -58.748,-59.464 -58.518,-59.235 -57.914,-59.839 -57.684,-59.609 -58.289,-59.005 -58.059,-58.775 -57.454,-59.379 -57.225,-59.15 -57.829,-58.545 -57.599,-58.315 -56.995,-58.92 -56.3,-58.225 -56.3,-55.3 v1(-56.85,-54.75)
  Signal Layer 2 w0.15: v1(-84.433,-76.1) -73.318,-76.1 -71.993,-77.425 -67.3,-77.425 -63.8,-80.925 v3(-61.425,-80.925) -60.875,-81.475 -53.925,-81.475 -51.225,-78.775 v1(-50.275,-78.775)
PHY_AD0: R710.1 R717.1 U700.14 | length 33.9
  Top Layer LF-Signals w0.15: U700.14@-6.325,-95.125 -6.325,-95.15 -3.905,-95.15 -3.43,-95.625 v3(-3.425,-95.625)
  Top Layer LF-Signals w0.18: R710.1@-27.869,-89.923 R717.1@-25.794,-89.923
  Signal Layer 1 w0.18: v1(-26.825,-89.923) -23.198,-93.55 -20.145,-93.55 -14.515,-99.18 -11.363,-99.18 -10.353,-98.17 -5.97,-98.17 v3(-3.425,-95.625)
PHY_AD1: R709.1 R716.1 U700.16 | length 30.7
  Top Layer LF-Signals w0.175: U700.16@-6.325,-94.125 -5.75,-94.125 v3(-5.325,-93.7)
  Top Layer LF-Signals w0.18: R709.1@-27.869,-81.873 v1(-26.825,-81.873) R716.1@-25.794,-81.873
  Signal Layer 1 w0.15: v3@-5.33,-93.695 v3(-5.325,-93.7)
  Signal Layer 1 w0.18: v1(-26.825,-81.873) -24.852,-81.873 -22.041,-84.684 -17.916,-84.684 -13.475,-89.125 -8.075,-89.125 -5.325,-91.875 v3(-5.325,-93.7)
PHY_CONFIG1: R712.1 U700.27 | length 1.9
  Top Layer LF-Signals w0.15: R712.1@-12.85,-94.825 v3(-12,-94.825) -11.7,-95.125 U700.27@-11.025,-95.125
PHY_LED0: J700.2 U700.24 | length 27.3
  Top Layer LF-Signals w0.18: J700.2@-11.305,-109.175 v3(-11.305,-105.85) ; v1(-10.85,-92.4) -10.85,-92.375 -10.425,-92.8 U700.24@-10.425,-93.525
  Bottom Layer LF-Signals w0.18: v3@-11.35,-105.975 v3@-11.225,-105.85 ; v3(-11.305,-105.85) v3@-11.225,-105.85 ; v1(-10.85,-92.4) -10.125,-93.125 -7.325,-93.125 -6.125,-94.325 -6.125,-97.6 -4.05,-99.675 -4.05,-101.25 -8.65,-105.85 v3@-11.225,-105.85
PHY_LED1: J700.11 U700.20 | length 25
  Top Layer LF-Signals w0.18: v3(-20.85,-105.825) -20.85,-109.17 J700.11@-20.845,-109.175 ; U700.20@-8.425,-93.525 v1(-8.425,-92.525)
  Signal Layer 2 w0.18: v3(-20.85,-105.825) -17.875,-105.825 -10.725,-98.675 -10.725,-93.975 -9.275,-92.525 v1(-8.425,-92.525)
POWER_LED_CTRL: Q900.2 R906.1 U900.K4 | length 34.4
  Top Layer LF-Signals w0.15: v9(-29.125,-18.775) -27.975,-17.625 -27.975,-14.767 -26.035,-12.827 -20.375,-12.827 ; -20.375,-12.825 v1(-19.501,-11.951)
  Bottom Layer LF-Signals w0.15: v9(-29.125,-18.775) -28.8,-18.45 U900.K4@-27.825,-18.45 ; v3(-6.85,-8.75) R906.1@-5.85,-8.75
  Bottom Layer LF-Signals w0.175: v1(-19.501,-11.951) -18.6,-11.05 -18.6,-10.025 -18.188,-9.613 -16.662,-9.613 -16.45,-9.825 -13.125,-9.825 -12.862,-10.088 -9.255,-10.088 -7.918,-8.75 v3(-6.85,-8.75) ; R906.1@-5.85,-8.75 R906.1@-5.7,-8.6 -3.875,-8.6 -3.725,-8.45 Q900.2@-3.725,-7.875
PSU_ENABLE: R125.1 R129.2 SW101.1 SW101.2 U104.7 U104.12 U104.16 U104.17 | length 51.6
  Top Layer LF-Signals w0.175: v3@-87.875,-16.9 v3(-87.85,-16.875) SW101.1@-87.85,-13.825 SW101.2@-87.85,-8.325
  Signal Layer 2 w0.175: v3@-87.875,-16.9 -87.275,-16.3 -67.325,-16.3 -66.3,-15.275 -59.952,-15.275 v1(-59.127,-14.45) -58.625,-13.948 -58.625,-13.025 -59.127,-12.523 v1(-59.127,-11.95) -57.075,-11.95 v1(-55.55,-10.425)
  Bottom Layer LF-Signals w0.175: R129.2@-88.175,-15.625 -87.875,-15.925 -87.875,-16.9 -86.875,-16.9 R125.1@-86.825,-16.95 ; v1(-59.127,-14.45) U104.7@-58.25,-14.45 ; v1(-59.127,-11.95) U104.12@-58.25,-11.95 ; U104.16@-56.05,-11.25 -56.05,-10.825 -55.65,-10.425 v1(-55.55,-10.425) U104.17@-55.55,-11.25
RCT: C705.1 J700.4 | length 12.9
  Top Layer LF-Signals w0.175: J700.4@-13.525,-109.175 -13.525,-112.4 v3(-12.9,-113.025) C705.1@-4.075,-113.025
RJ45_GND: C705.2 C706.2 J700.13 J700.14 L702.2 | length 1.4
  Top Layer LF-Signals w0.175: C706.2@-4.075,-115.55 C705.2@-4.075,-114.125
  other v3: -15.85,-129.225
RX_N: J700.5 U700.7 | length 16.2
  Top Layer LF-Signals w0.127: J700.5@-14.545,-109.175 -14.545,-106.812 v1(-13.875,-106.142) ; U700.7@-7.425,-98.225 -7.425,-98.538 -7.537,-98.65 -7.537,-98.95 -6.437,-100.05 v1(-6.4,-100.05)
  Bottom Layer LF-Signals w0.127: v1(-13.875,-106.142) -13.875,-105.725 -13.664,-105.513 -13.664,-105.064 -9.697,-101.098 -8.126,-101.098 -7.29,-100.261 -7.036,-100.261 -6.825,-100.05 v1(-6.4,-100.05)
RX_P: J700.3 U700.6 | length 16.5
  Top Layer LF-Signals w0.127: v1(-13.175,-106.142) -12.505,-106.812 J700.3@-12.505,-109.175 ; U700.6@-7.925,-98.225 -7.925,-98.538 -7.814,-98.65 -7.814,-99.336 v1(-6.4,-100.75)
  Bottom Layer LF-Signals w0.127: v1(-13.175,-106.142) -13.175,-105.725 -13.387,-105.513 -13.387,-105.179 -9.582,-101.375 -8.011,-101.375 -7.175,-100.538 -7.036,-100.538 -6.825,-100.75 v1(-6.4,-100.75)
SHIELD: C903.2 J900.6@-11.512,-1.675 J900.7@-19.687,-1.675 J900.8@-13.375,-4.8 J900.9@-17.825,-4.8 R919.2 | length 18.9
  Top Layer LF-Signals w0.3: J900.7@-19.687,-1.675 -19.687,-3.738 -18.625,-4.8 J900.9@-17.825,-4.8 -17.825,-6.15 C903.2@-18.1,-6.425 -18.975,-6.425 R919.2@-19,-6.4
  Bottom Layer LF-Signals w0.3: J900.7@-19.687,-1.675 J900.6@-12.05,-1.675 ; J900.8@-13.375,-4.8 -13.375,-3 J900.6@-12.05,-1.675 ; J900.6@-11.512,-1.675 J900.6@-12.05,-1.675
STATUS_LED_CTRL: Q900.5 R909.2 U900.F1 | length 29.7
  Top Layer LF-Signals w0.15: v1(-20.05,-21.925) -19.521,-21.925 -9.746,-12.15 -2.8,-12.15
  Bottom Layer LF-Signals w0.15: U900.F1@-25.225,-20.4 -23.7,-21.925 v1(-20.05,-21.925)
  Bottom Layer LF-Signals w0.175: Q900.5@-3.725,-9.725 -3.725,-10.4 -3.3,-10.825 v3(-3.3,-12.15)
SWCLK: R904.1 U900.D6 | length 12.4
  Top Layer LF-Signals w0.15: v3(-28.95,-26.368) -28.95,-26.361 -24.25,-21.661 v5(-24.25,-17.475)
  Bottom Layer LF-Signals w0.175: R904.1@-28.95,-27.468 v3(-28.95,-26.368) ; v5(-24.25,-17.475) U900.D6@-23.925,-17.15
SWDIO: R905.1 U900.C5 | length 11.7
  Top Layer LF-Signals w0.15: v3(-27.625,-26.368) -27.625,-25.525 -23.625,-21.525 -23.625,-18.8 v5(-22.95,-18.125)
  Bottom Layer LF-Signals w0.15: U900.C5@-23.275,-17.8 v5(-22.95,-18.125)
  Bottom Layer LF-Signals w0.175: R905.1@-27.625,-27.468 v3(-27.625,-26.368)
TARGET_CHIP_ERASE: R900.1 U900.K6 | length 15.9
  Top Layer LF-Signals w0.175: v3(-35.125,-26.375) -31.6,-22.85 -31.6,-17.9 v1(-29.925,-16.225)
  Bottom Layer LF-Signals w0.175: R900.1@-35.125,-27.475 v3(-35.125,-26.375) ; v1(-29.925,-16.225) -29,-17.15 U900.K6@-27.825,-17.15
TARGET_RESET: C104.1 J403.10 J501.3@-67.93,-37.874 J506.5@-45.07,-68.481 R106.1 R107.2 R110.2 R402.2 U200.83 U900.H2 | length 164.2
  Top Layer LF-Signals w0.18: U200.83@-34.4,-53.75 -33.35,-53.75 -32.75,-53.15 v1(-29.15,-53.15) ; v1(-28.275,-22.1) -29.875,-20.5 -29.875,-17.335 -28.615,-16.075 -28.615,-14.786 -26.148,-12.319 -23.495,-12.319 -23.1,-11.924 C104.1@-23.1,-10.65 ; C104.1@-23.1,-10.65 R110.2@-23.1,-9.8 R106.1@-21.975,-9.8 R107.2@-21.975,-10.675 -23.075,-10.675 C104.1@-23.1,-10.65
  Top Layer LF-Signals w0.185: J403.10@-39.69,-21.91 v1(-39.69,-19.893)
  Signal Layer 1 w0.18: v1(-30.1,-69.525) -29.375,-68.8 -29.375,-63.265 -28.575,-62.465 -28.575,-55.475 -29.15,-54.9 v1(-29.15,-53.15) -29.15,-49 -28.625,-48.475 -28.625,-38.525 -29.575,-37.575 v1(-29.575,-36.4)
  Signal Layer 2 w0.18: J506.5@-45.07,-68.481 -43.904,-67.315 -35.285,-67.315 -33.525,-69.075 -30.55,-69.075 v1(-30.1,-69.525)
  Signal Layer 2 w0.185: v1(-80.525,-36.587) -79.238,-37.874 J501.3@-67.93,-37.874 -65.248,-35.193 -48.668,-35.193 -47.875,-34.4 -31.575,-34.4 v1(-29.575,-36.4) ; v1(-39.69,-19.893) -37.483,-22.1 v1(-28.275,-22.1)
  Bottom Layer LF-Signals w0.125: -26.85,-20.675 -26.85,-20.231
  Bottom Layer LF-Signals w0.18: v1(-29.575,-36.4) -29.59,-36.385 -29.59,-25.85 -28.275,-24.535 v1(-28.275,-22.1) -26.85,-20.675 ; -26.85,-20.231 -26.85,-20.075 U900.H2@-26.525,-19.75
  Bottom Layer LF-Signals w0.185: R402.2@-81.159,-35.56 -80.525,-36.194 v1(-80.525,-36.587)
TARGET_USB_N: D302.3 J302.2 U200.136 | length 37.4
  Top Layer LF-Signals w0.175: -49.823,-38.437 -49.823,-19.92 cw(c-46.935,-19.92) -48.978,-17.878 -47.748,-16.648 ccw(c-49.79,-14.606) -46.912,-14.843 ccw(c-49.79,-14.606) -46.902,-14.606 -46.902,-12.358 ccw(c-49.442,-12.358) -47.646,-10.562 -47.654,-10.554 cw(c-47.001,-9.901) -47.925,-9.901 -47.925,-9.428 -47.685,-9.189 cw(c-47.146,-9.727) -47.146,-8.966 D302.3@-47.059,-8.878 ; U200.136@-49.75,-39.45 U200.136@-49.75,-38.616 ; J302.2@-47.784,-4.475 -47.784,-5.238 -47.935,-5.389 -47.935,-8.375 -47.696,-8.614 ccw(c-47.27,-8.189) -47.27,-8.791 cw(c-47.27,-9.089) D302.3@-47.059,-8.878
  Top Layer LF-Signals w0.18: -49.823,-38.437 -49.75,-38.51 U200.136@-49.75,-38.616